# Altium PCB ir-tara-smd.PcbDoc
Units mm, origin at the board's own origin, x right, y up, seen from the top; angles counter-clockwise.
Board outline 151 x 86.38 mm, 2 copper layers (Top Layer, Bottom Layer); 16 components, 12 nets, 45 pads, 0 vias.
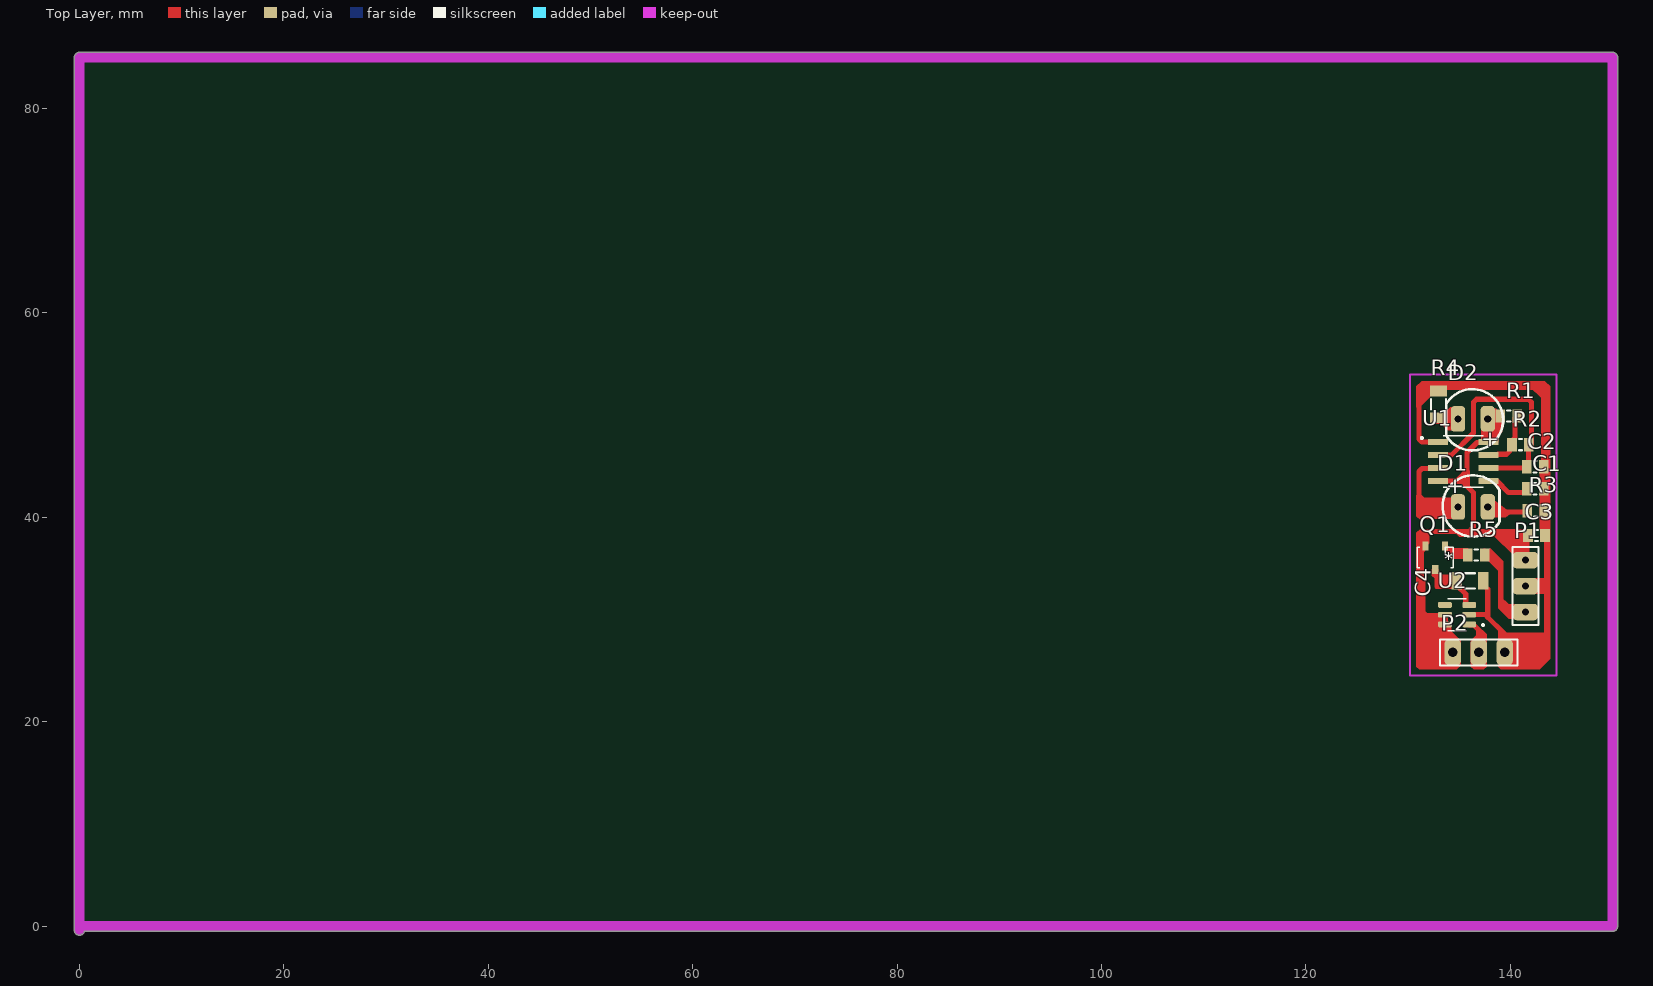
[diagram p0: Top Layer view]
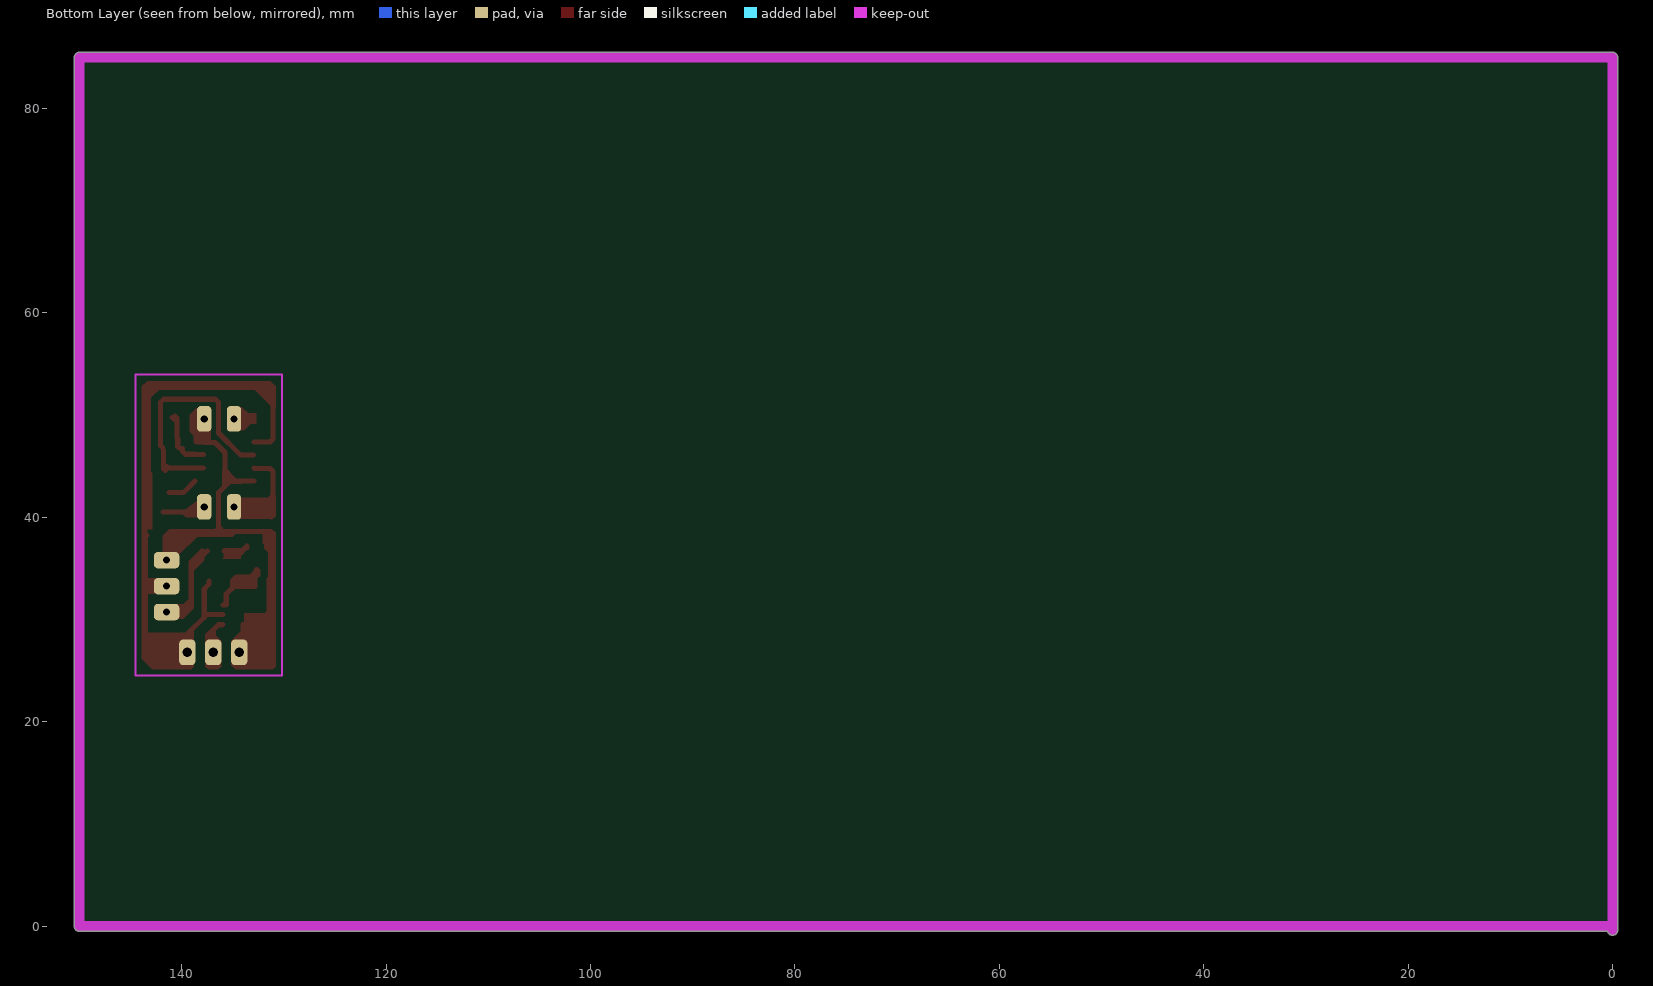
[diagram p1: Bottom Layer view, seen from below]
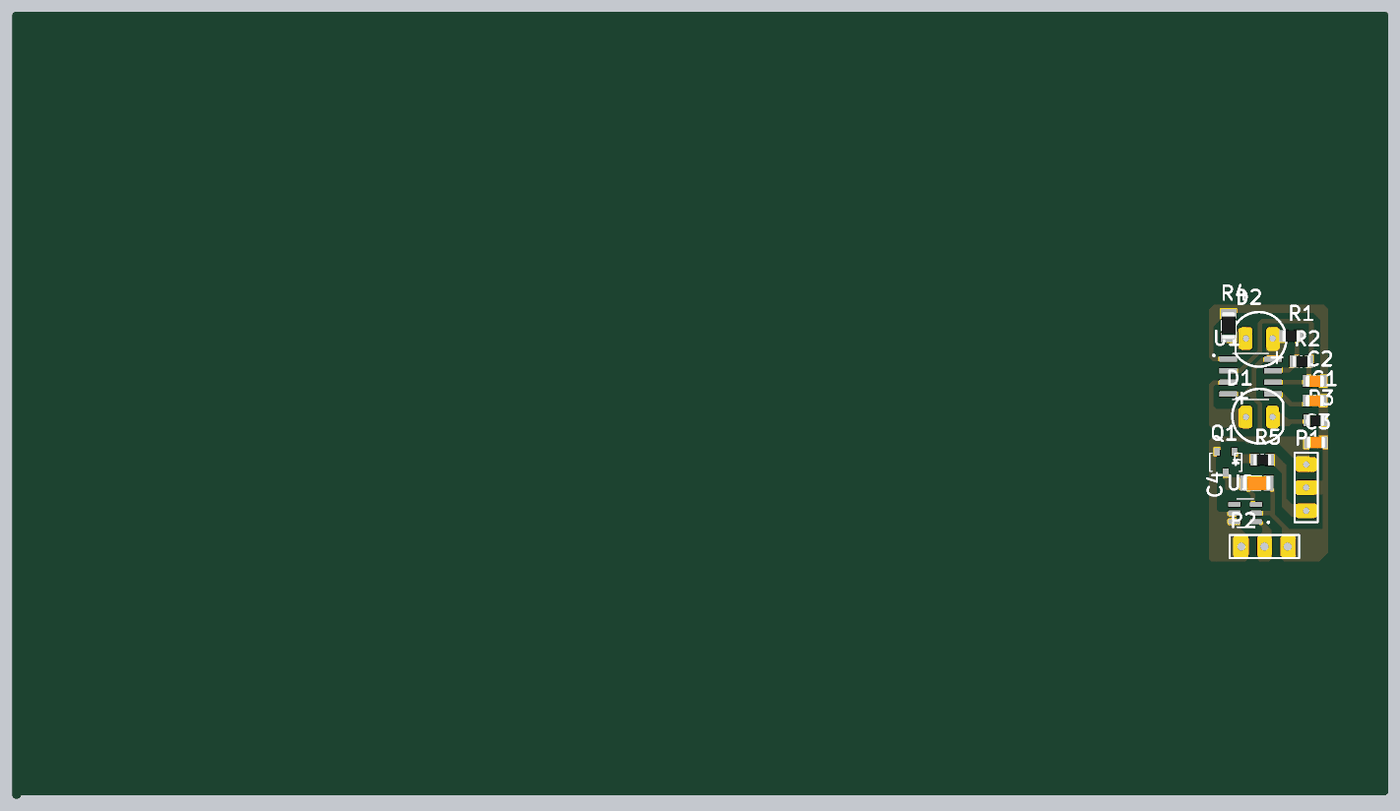
[diagram p2: 3D render of the assembled board from above, using the file's embedded part models]

## Layer stack, top to bottom
Top Solder: solder mask 0.0102, Solder Resist, Dk 3.5
Top Layer: signal copper 0.0356
Dielectric 1: dielectric 0.32, FR-4, Dk 4.8
Bottom Layer: signal copper 0.0356
Bottom Solder: solder mask 0.0102, Solder Resist, Dk 3.5

## Board outline
-0.5,-0.381 -0.5,85 cw(c0,85) 0,85.5 150,85.5 cw(c150,85) 150.5,85 150.5,0 cw(c150,0) 150,-0.5 0.486,-0.5 cw(c0,-0.381)

## Design rules (kind name [scope] priority, off if disabled: settings)
Clearance Clearance_1 [InPolygon] p1: gap=0.8 ignorepadtopadclearanceinfootprint=FALSE
Clearance [All] p2: gap=0.254 ignorepadtopadclearanceinfootprint=FALSE except(0: Arc-Hole Track-Hole SMDPad-Hole THPad-Hole Via-Hole Fill-Hole Poly-Hole Region-Hole Text-Hole)
PolygonConnect [All] p1: connectstyle=Relief reliefconductorwidth=0.254 reliefentries=4 polygonreliefangle="90 Angle" airgapwidth=0.254
RoomDefinition ir-tara-smd-ttp223 [InComponentClass('ir-tara-smd-ttp223')] p1: confinementstyle=ConfineIn formatcopy=TRUE lockcomponents=FALSE outline 144.907,-4.953 247.904,-4.953 247.904,23.114 144.907,23.114
RoutingLayers [All] p1: top layer_v5=FALSE bottom layer_v5=TRUE
RoutingVias [All] p1: holewidth=0.711 width=2.5 viastyle="Through Hole" minholewidth=0.711 minwidth=1.27 maxholewidth=0.711 maxwidth=2
SolderMaskExpansion [All] p1: expansion=0.102 istentingtop=FALSE
Width [All] p1: maxlimit=3 minlimit=0.5 preferedwidth=1
29 further rules are at their usual default settings.

## Components (designator, comment, footprint, x,y, rotation, side; value= is the part's Value field where it differs from the comment)
C1 "=Value" "CAP 0805" 142.494,42.799 r0 top
C2 "=Value" "CAP 0805" 142.494,44.958 r0 top
C3 "=Value" "CAP 0805" 142.621,38.227 r0 top
C4 "=Value" "CAP 1206" 136.017,33.782 r0 top
D1 "MODEL" LED-5mm 136.271,41.021 r90 top
D2 "MODEL" LED-5mm 136.398,49.638 r270 top
P1 "Header 3" HDR1X3#1 141.478,35.814 r270 top
P2 "Header 3" HDR1X3#2 134.366,26.797 r0 top
Q1 "2N3906" SOT23-3 133.924,36.061 r180 top
R1 "10K" "RES 0805 (2012X06L)" 139.827,49.911 r180 top
R2 "10K" "RES 0805 (2012X06L)" 140.97,47.117 r180 top
R3 "10K" "RES 0805 (2012X06L)" 142.494,40.64 r0 top
R4 "10K" "RES 1206 (3216X08L)" 132.969,51.054 r90 top
R5 "10K" "RES 0805 (2012X06L)" 136.652,36.322 r180 top
U1 "LM555CM/NOPB" SOIC127P599X175-8N 135.382,45.466 r0 top
U2 "TTP223_" SOT95P285X126-6N 134.789,30.48 r180 top

## Footprints (in the part's own frame and the unit in brackets; to place one, negate y for a bottom-side part, rotate by r counter-clockwise, add the part's x,y. Pads: shape width x height; smd on the part's side, far side on the other; paste and mask are expansions set on the pad)
"CAP 0805" [mm]
  rect 0.95x1.3 smd: 1(-0.889,0) 2(0.761,0)
  silkscreen extent -0.21,-0.55 0.09,0.55, body extent -1.08,-0.63 0.95,0.63, height 0.65
"CAP 1206" [mm]
  rect 1.05x1.7 smd: 1(-1.27,0) 2(1.326,0)
  silkscreen extent -0.47,-0.75 0.53,0.75, body extent -1.49,-0.77 1.55,0.75, height 0.75
HDR1X3#1 [mm] "Connector; Header; 3 Position"
  rrect50% 1.6x2.5 hole 0.7: 1(0,0) 2(2.54,0) 3(5.08,0)
  silkscreen extent -1.27,-1.27 6.35,1.27
HDR1X3#2 [mm] "Connector; Header; 3 Position"
  rrect50% 1.6x2.5 hole 0.9: 1(0,0) 2(2.54,0) 3(5.08,0)
  silkscreen extent -1.27,-1.27 6.35,1.27
LED-5mm [mm] "LED; 2 Leads"
  rrect50% 2.5x1.4 hole 0.7: 1(0,1.397) 2(0,-1.524)
  silkscreen extent -2.91,-2.67 3.09,2.9
"RES 0805 (2012X06L)" [mm] "Chip Resistor, 2-Leads, Body 2.0x1.3mm, IPC High Density _ (0.100 W)"
  rect 0.95x1.3 smd: 1(-0.838,0) 2(0.812,0)
  silkscreen extent -0.16,-0.55 0.14,0.55, body extent -1.03,-0.63 1,0.64, height 0.6
"RES 1206 (3216X08L)" [mm] "Chip Resistor, 2-Leads, Body 3.2x1.6mm, IPC High Density _ (0.125 W)"
  rect 1.05x1.7 smd: 1(-1.295,0) 2(1.301,0)
  silkscreen extent -0.5,-0.75 0.5,0.75, body extent -1.52,-0.76 1.53,0.76, height 0.6
SOIC127P599X175-8N [mm]
  rrect25% 1.97x0.6 smd: 1(-2.47,1.905) 2(-2.47,0.635) 3(-2.47,-0.635) 4(-2.47,-1.905) 5(2.47,-1.905) 6(2.47,-0.635) 7(2.47,0.635) 8(2.47,1.905)
  silkscreen extent -4.14,-2.52 1.95,2.52
SOT23-3 [mm]
  rect 0.6x0.9 smd: 1(0.32,-1.15) 2(2.22,-1.15) 3(1.27,1.15)
  silkscreen extent -0.48,-1 3.02,1
SOT95P285X126-6N [mm]
  rrect50% 1.35x0.57 smd: 1(-1.185,0.95) 2(-1.185,0) 3(-1.185,-0.95) 4(1.185,-0.95) 5(1.185,0) 6(1.185,0.95)
  silkscreen extent -2.64,-1.56 0.9,1.56

## Part data
C1 C2 C3 C4: library part Capacitor, "Capacitor"
D1 D2: library part "LED 5mm", "Typical LED", COLOR=RED
P1 P2: "Header, 3-Pin", LatestRevisionDate=17-Jul-2002, LatestRevisionNote="Re-released for DXP Platform.", Publisher="Altium Limited"
Q1: "PNP General Purpose Amplifier", ComponentLink1Description="Manufacturer Link", ComponentLink1URL=http://www.fairchildsemi.com/, ComponentLink2Description=Datasheet, ComponentLink2URL=http://www.fairchildsemi.com/ds/2N%2F2N3906.pdf, DatasheetVersion=1997, LatestRevisionDate=15-Jan-2003, LatestRevisionNote="PCB Footprint 'BCY-W3/D4.7' replaced", PackageDescription="TO, Flat Index; 3 In-Line, Axial Leads; Body Dia. 4.5mm; Leads 0.51 x 0.48 mm (max)", PackageReference=TO-92A, PackageVersion=Sep-1998, Published=8-Jun-2000, Publisher="Altium Limited"
R1 R2 R3 R4 R5: library part Resistor, "Resistor", Power="1/4 W", Tolerance=5%
U1: "Highly Stable 555 Timer 8-SOIC 0 to 70", Package=None, Availability=Unavailable, MP=LM555CM/NOPB, Price=None
U2: "22 kOhms Â±5% 0.1W, 1/10W Chip Resistor 0402 _1005 Metric_ Automotive AEC-Q200, Moisture Resistant Thick Film", Package="0402 KOA Speer", Availability=Unavailable, MF="KOA Speer", MP=TTP223, Price=None, SnapEDA_Link=https://www.snapeda.com/parts/TTP223%20/KOA%20Speer/view-part/2780209/?ref=snap

## Nets (pads, with @x,y where several pads share a name; then routed paths per layer and width w, separated by ;. In a path a pad name is that pad's centre, name@x,y a point inside that pad or via, vN(x,y) a via of type N, cw(c..) or ccw(c..) an arc to the next point about the centre after c; other vN are vias at no path point)
GND: C1.2 C2.2 C3.2 C4.2 P1.2 P2.3 R3.2 R4.2 U1.1 U2.2 | length 57.8
  Top Layer w0.5: U1.1 131.357,47.371 131.064,47.664 131.064,51.054 132.715,52.705 142.494,52.705 143.255,51.944 C2.2 C2.2@143.255,44.577 ; U2.2 137.541,30.48 137.795,30.226 ; C4.2 137.343,33.457 137.795,33.005 137.795,30.226 ; P2.3@139.319,27.051 139.319,28.702 ; P1.2 143.566,33.274 ; C1.2 143.383,42.927 C2.2@143.383,44.577 ; C3.2 143.607,38.452 143.607,38.89 143.637,38.92 143.637,39.116 ; 143.439,39.878 143.439,40.64 143.439,41.783 ; 143.439,41.91 C1.2@143.439,42.799 ; C3.2@143.566,38.1 143.566,33.274 ; 137.795,30.226 139.319,28.702 ; 139.319,28.702 140.208,27.813 143.273,27.813 143.566,28.106 143.566,32.834 143.566,33.274
NetC1_1: C1.1 U1.5 | length 3
  Top Layer w0.5: U1.5@138.684,43.561 139.827,42.418 C1.1@141.224,42.418
NetC2_1: C2.1 R2.1 U1.2 U1.6 | length 23.5
  Top Layer w0.5: U1.2@132.999,46.088 134.226,46.088 136.398,48.26 136.398,51.269 136.691,51.562 141.76,51.562 142.053,51.269 142.053,46.98 142.033,46.98 141.808,46.755 R2.1@141.808,46.736 ; U1.6 141.38,44.831 141.449,44.9 C2.1@141.449,44.977 ; C2.1@141.605,44.577 141.778,44.75 R2.1@141.778,46.492
NetC4_1: C4.1 Q1.3 U2.3 | length 5.9
  Top Layer w0.5: Q1.3 132.704,34.861 132.704,34.711 133.252,34.163 134.646,34.163 135.022,33.787 135.022,33.126 135.636,32.512 135.636,31.465 135.671,31.43 U2.3
NetD1_1: D1.1 U1.3 | length 8.7
  Top Layer w0.5: U1.3 132.862,44.781 131.357,44.781 131.064,44.488 131.064,41.91 131.953,41.021 D1.1
NetD1_2: D1.2 R3.1 | length 4
  Top Layer w0.5: D1.2@137.795,40.525 R3.1@141.835,40.525
NetD2_2: D2.2 R4.1 | length 2.1
  Top Layer w0.5: R4.1@132.994,49.53 133.041,49.484 134.284,49.484 134.432,49.336 134.572,49.336 D2.2
NetP1_3: P1.3 R5.1 | length 8.7
  Top Layer w0.5: R5.1@137.49,36.703 139.065,35.128 139.065,31.242 139.446,30.861 141.351,30.861 P1.3
NetQ1_2: Q1.1 R5.2 | length 2.5
  Top Layer w0.5: Q1.1 133.604,37.061 133.654,37.011 133.804,37.011 134.112,36.703 R5.2@135.84,36.703
NetR1_1: R1.1 R2.2 U1.7 | length 6.4
  Top Layer w0.5: U1.7@137.885,46.151 138.79,46.151 138.811,46.172 139.64,46.172 139.933,46.465 139.933,46.717 139.952,46.736 140.158,46.736 140.383,46.961 140.383,47.731 140.462,47.81 140.462,49.559 140.462,49.708 R1.1 ; R1.1@140.694,49.559 R1.1@140.919,49.784
o1: P2.2 U2.1 | length 3.3
  Top Layer w0.5: U2.1 136.009,29.495 136.399,29.495 136.906,28.988 P2.2
VCC: C3.1 D2.1 P1.1 P2.1 Q1.2 R1.2 U1.4 U1.8 U2.5 U2.6 | length 41.6
  Top Layer w0.5: Q1.2@131.699,37.338 131.699,38.315 131.992,38.608 136.398,38.608 ; Q1.2 131.704,37.061 131.654,37.011 131.611,37.011 131.318,36.718 131.318,30.861 132.649,29.53 133.994,29.53 133.994,27.169 P2.1 ; U1.4 134.747,43.561 135.001,43.815 135.763,44.577 135.763,46.355 136.729,47.321 137.802,47.321 U1.8 138.537,47.371 138.587,47.421 138.587,49.027 D2.1@138.294,49.32 ; 133.096,26.797 133.858,26.797 P2.1@134.112,27.051 ; 135.129,43.687 136.398,42.418 136.398,38.608 ; P1.1@141.478,36.195 140.716,36.195 138.303,38.608 136.398,38.608
pads on no net: U2.4

## Keep-outs
Keep-Out Layer:
  lines w0.2: 130.175,24.511 130.175,53.975 130.81,53.975 144.526,53.975 144.526,24.511 130.175,24.511
  lines w1: 0,-0.381 0,85 150,85 150,0 0,0

## Other copper
Top Layer:
  region net NetD2_2: 132.715,50.165 133.477,50.165 134.112,50.8 134.874,50.8 134.874,48.768 134.62,48.514 133.858,48.514 133.223,49.149 132.715,49.149
  region net VCC: 137.16,47.498 137.16,49.657 137.541,49.657 138.557,50.673 139.192,50.038 139.192,48.895 139.192,48.387 138.126,47.321 137.266,47.321
  region net NetC4_1: 132.334,34.925 132.334,34.29 132.588,34.036 132.588,33.147 132.715,33.02 134.747,33.02 135.001,32.766 135.001,33.528 134.239,34.29 133.477,34.29
  region net NetP1_3: 138.049,36.957 139.319,35.687 139.319,32.004 138.811,32.004 138.811,34.798 137.795,35.814 137.795,36.703 137.668,36.83
  region net VCC: 134.747,38.354 135.001,38.1 138.557,38.1 140.716,35.941 141.859,35.941 141.859,38.227 141.224,38.862 136.779,38.862 136.525,39.116 136.144,39.116 135.763,38.735 134.747,38.735
  region net VCC: 131.699,30.607 131.699,34.036 131.191,34.544 131.191,36.591 132.08,37.48 132.08,38.862 131.191,38.862 130.81,38.481 130.81,25.4 131.064,25.146 131.445,25.146 131.572,25.273
  region net GND: 143.891,39.37 143.891,26.162 143.764,26.035 143.383,26.416 143.383,38.226 143.382,38.227
  region net GND: 143.891,44.196 143.891,52.832 143.383,53.34 131.318,53.34 130.81,52.832 130.81,50.8 131.064,50.8 132.969,52.705 141.986,52.705 143.002,51.689 143.002,43.561
  region net VCC: 131.064,31.242 131.064,25.4 131.318,25.146 134.747,25.146 135.128,25.527 135.128,27.94 134.112,28.956 134.112,29.718 132.461,29.718 131.984,30.195
  region net o1: 136.652,28.448 136.144,27.94 136.144,25.4 136.398,25.146 137.414,25.146 137.668,25.4 137.668,28.575 136.779,29.464
  region net NetP1_3: 139.065,32.258 139.827,31.496 141.605,31.496 141.478,31.369 141.478,30.099 139.827,30.099 138.811,31.115 139.065,31.369
  region net GND: 141.224,34.036 143.51,34.036 143.51,32.512 141.097,32.512
  region net NetC4_1: 132.842,34.29 133.985,33.147 135.001,33.147 135.022,33.126 135.022,34.142 135.001,34.163
  region net NetQ1_2: 133.477,36.957 134.239,36.195 134.239,35.941 136.017,35.941 135.89,36.068 135.89,36.957 134.058,36.957 133.958,36.857 133.604,37.211 133.731,37.338 133.731,37.465
  region net VCC: 132.969,27.686 134.493,27.686 134.366,27.559 134.366,26.035 132.969,26.035 132.842,26.162 132.842,26.797 132.715,26.924
  region net VCC: 131.699,30.607 133.858,30.607 133.858,29.337 132.715,29.337
  region net GND: 139.319,28.702 143.764,28.702 143.764,26.035 142.875,25.146 139.065,25.146 138.811,25.4 138.811,28.956 139.065,28.956
  region net GND: 143.891,44.196 143.891,38.735 143.764,38.862 142.875,38.862 142.875,44.323 143.129,44.577
  region net NetD1_2: 138.43,41.656 140.081,40.386 139.573,40.005 137.441,39.978 137.414,40.005 137.541,40.132 137.541,41.529
  region net NetD1_1: 134.239,41.91 131.572,41.91 131.064,42.418 130.81,42.164 130.81,40.132 131.191,39.751 131.318,39.878 134.747,39.878 134.874,40.005
  region: 145.796,24.003
  region net VCC: 136.017,44.577 136.017,44.45 136.017,42.799 135.509,43.307 134.112,43.307 133.985,43.434 134.62,43.434 135.636,44.45 135.636,44.831

## Text inside footprints (layer, text, board x,y; h text height)
D1: Top Overlay "+" at 135.509,43.688 h1.52 r180
D2: Top Overlay "+" at 137.16,46.971 h1.52
Q1: Top Overlay "*" at 134.404,37.061 h1.27 r180